# Altium PCB ESP_Adapter_Board_GPIO_PIN.PcbDoc
Units mm, origin at the board's own origin, x right, y up, seen from the top; angles counter-clockwise.
Board outline 33 x 36 mm, 2 copper layers (Top Layer, Bottom Layer); 7 components, 35 nets, 87 pads, 49 vias.
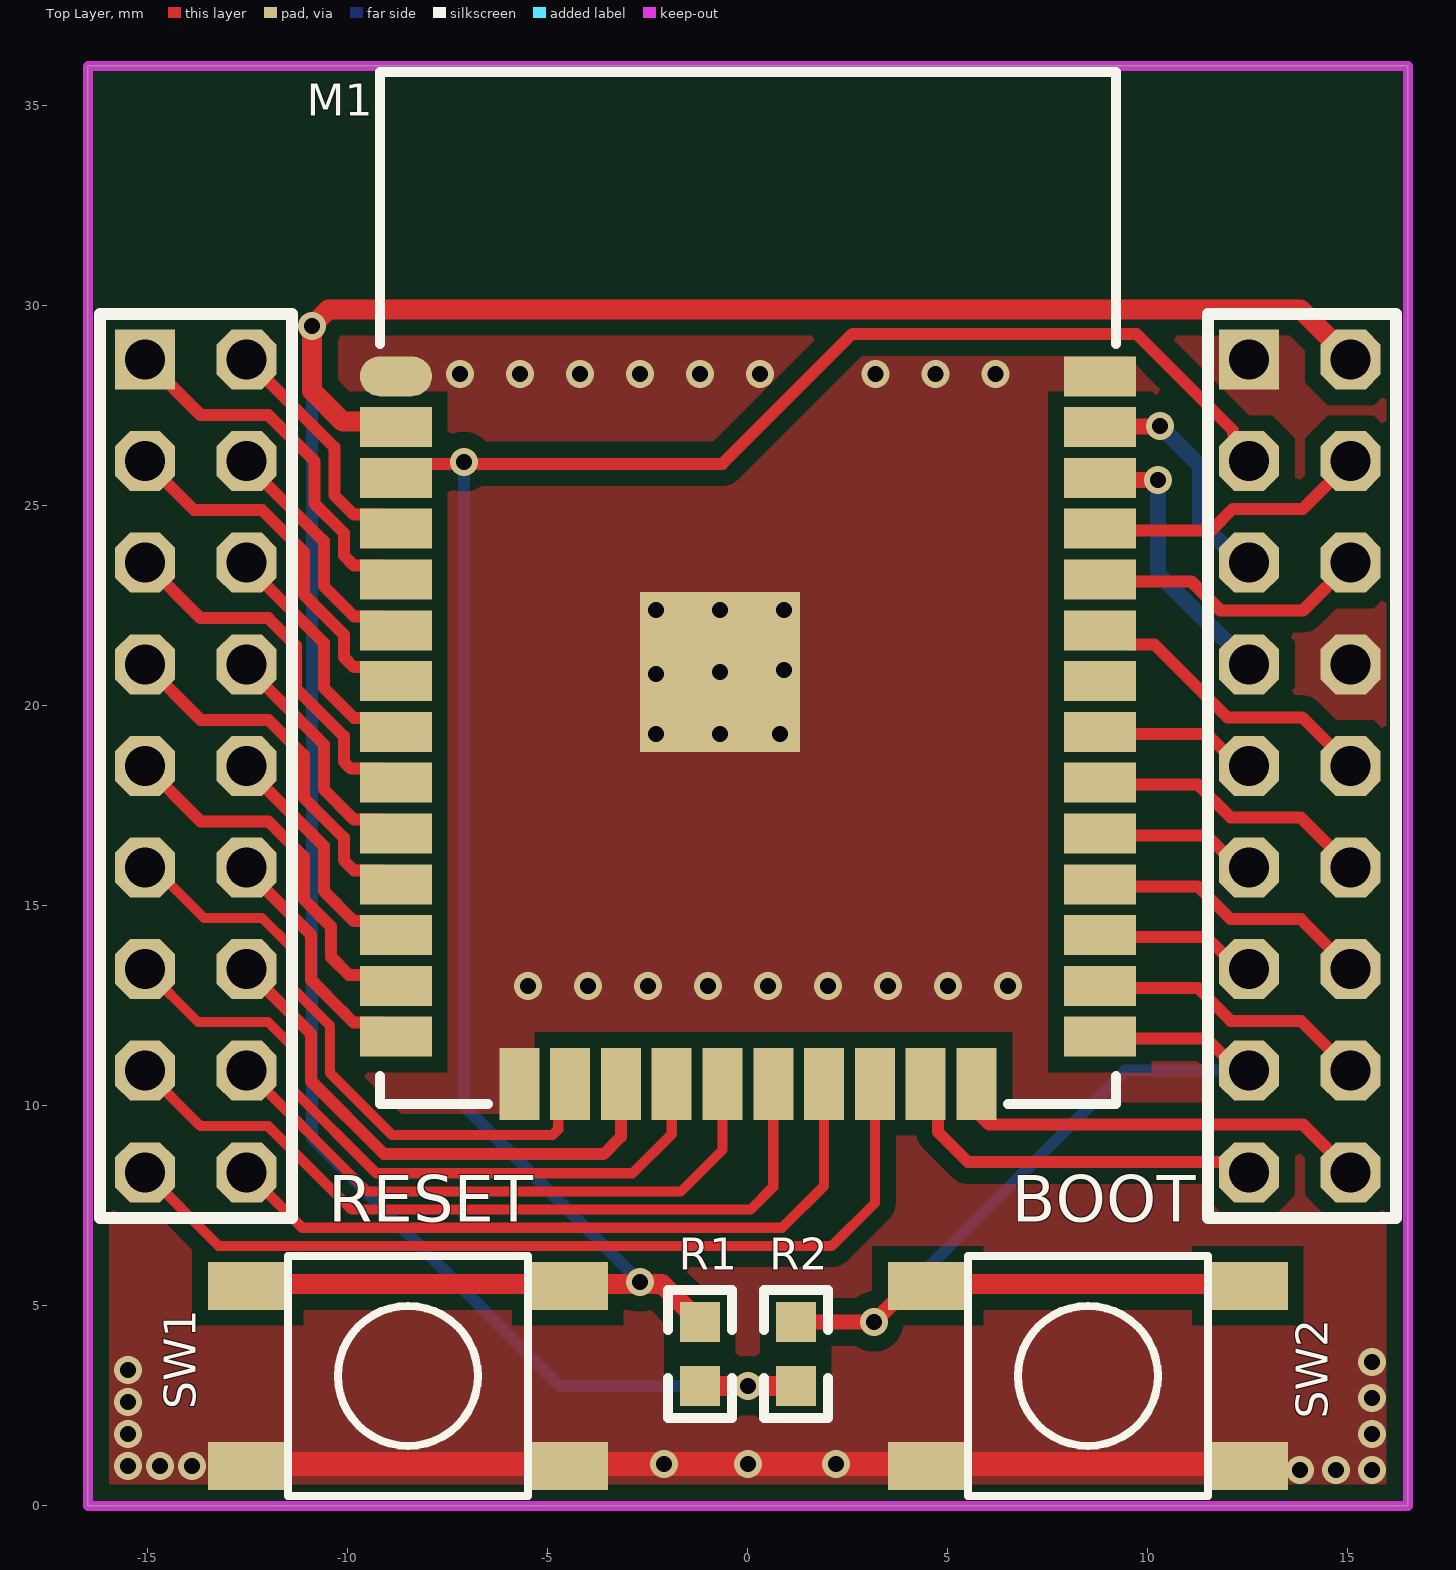
[diagram p0: Top Layer view]
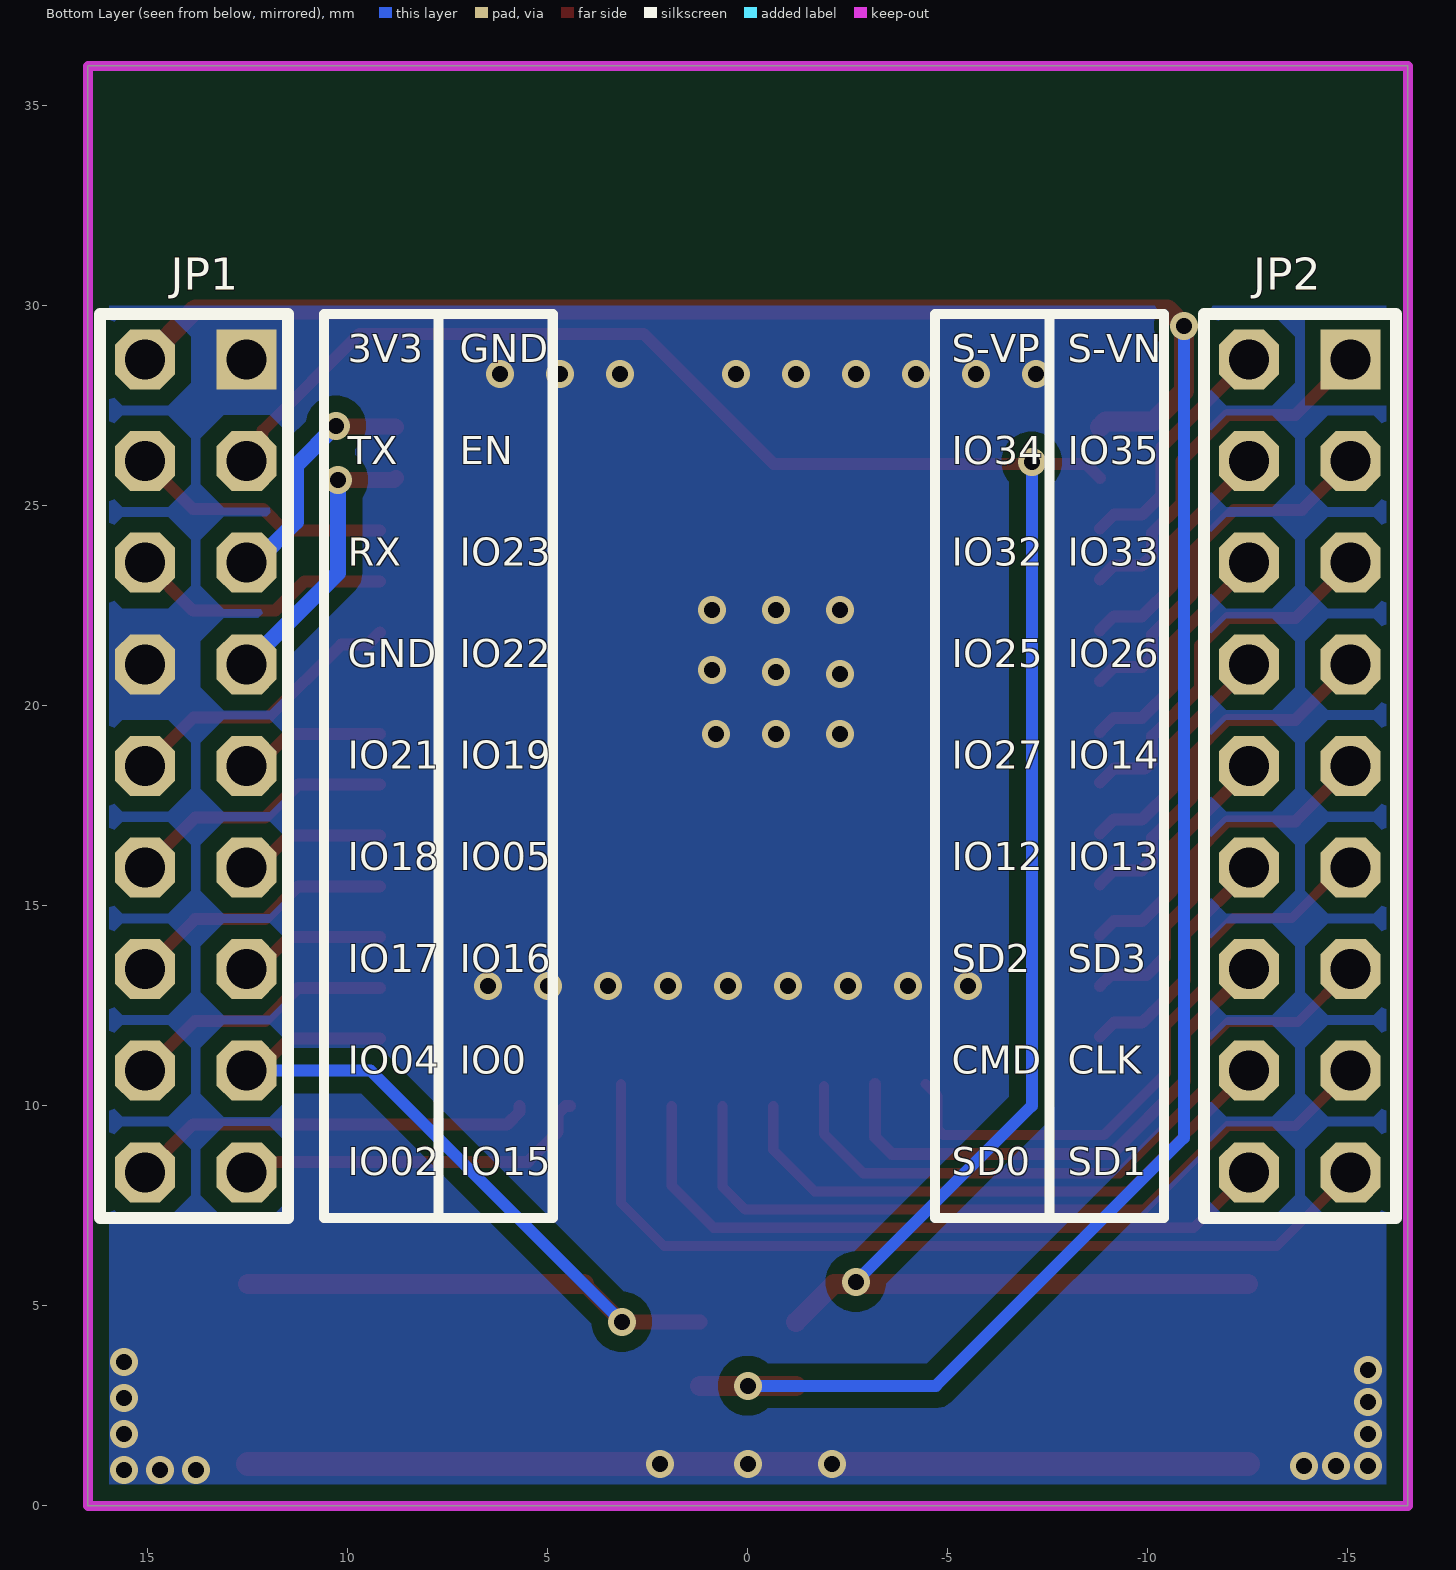
[diagram p1: Bottom Layer view, seen from below]
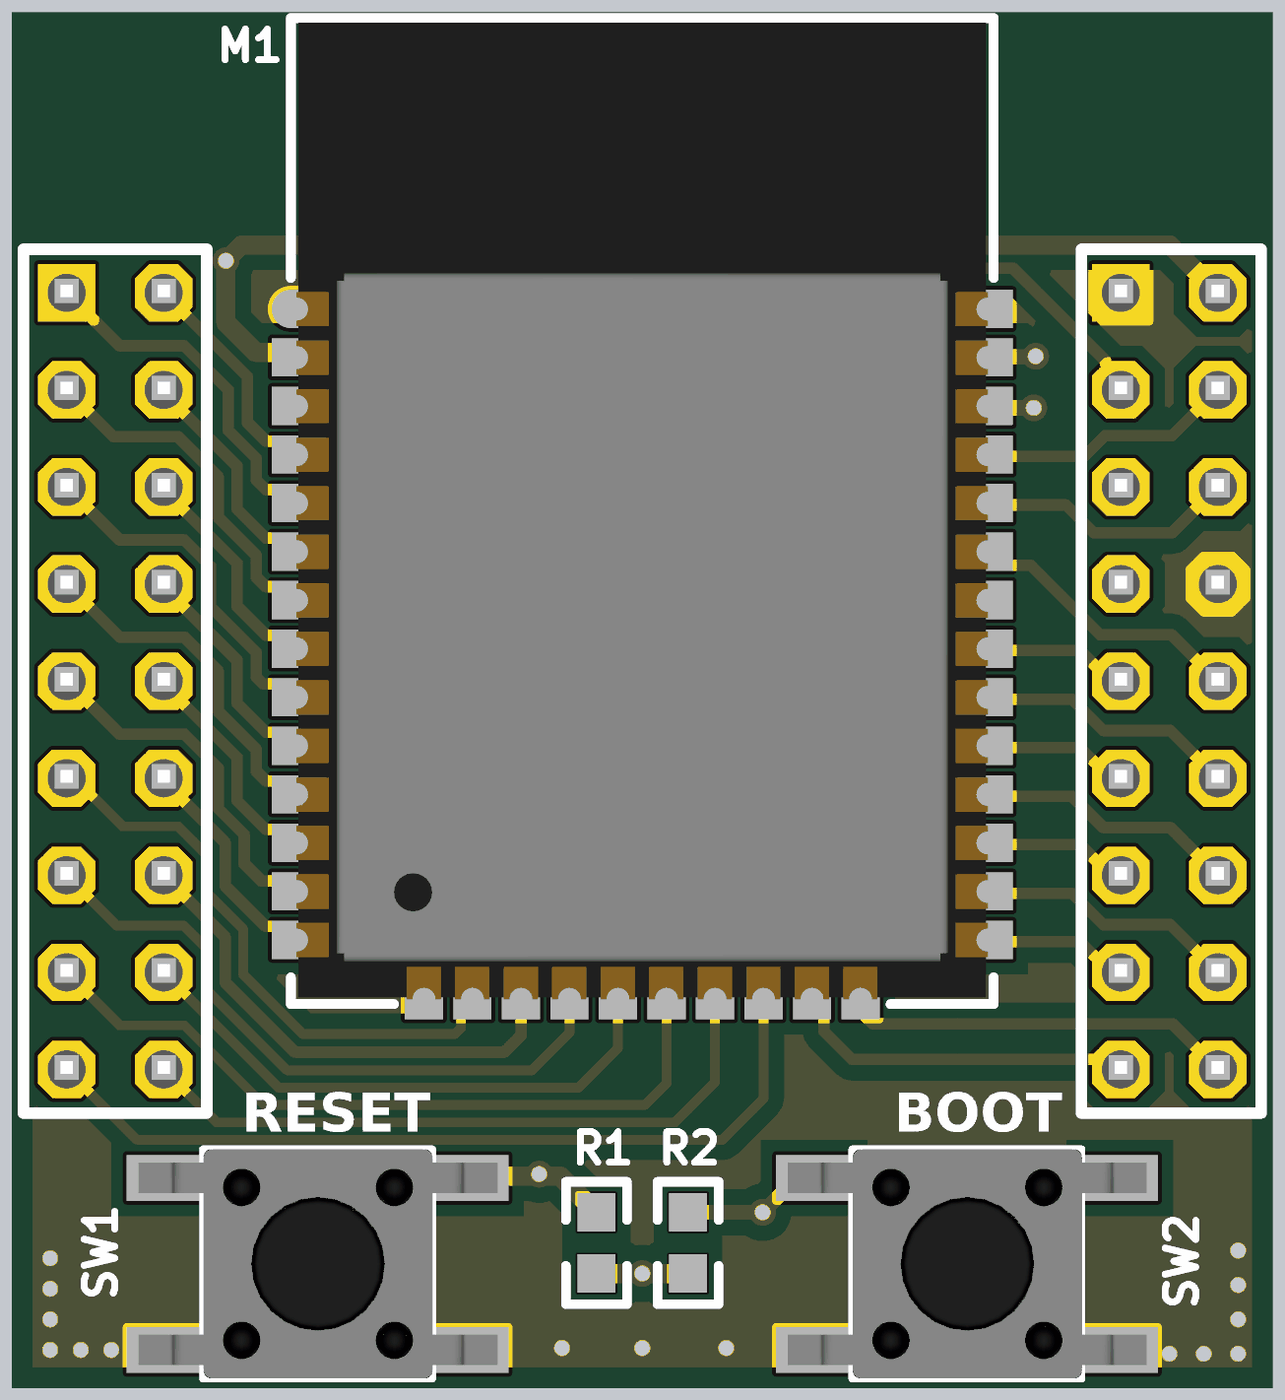
[diagram p2: 3D render of the assembled board from above, using the file's embedded part models]

## Layer stack, top to bottom
Top Solder: solder mask 0.0102, Solder Resist, Dk 3.5
Top Layer: signal copper 0.0356
Dielectric 1: dielectric 0.32, FR-4, Dk 4.8
Bottom Layer: signal copper 0.0356
Bottom Solder: solder mask 0.0102, Solder Resist, Dk 3.5

## Board outline
-16.5,0 16.5,0 16.5,36 -16.5,36

## Design rules (kind name [scope] priority, off if disabled: settings)
Clearance [All] p1: gap=0.254 ignorepadtopadclearanceinfootprint=FALSE except(0: Arc-Hole Track-Hole SMDPad-Hole THPad-Hole Via-Hole Fill-Hole Poly-Hole Region-Hole Text-Hole; 0.2: Arc-Track Track-Track; 0.4: Arc-Poly Track-Poly SMDPad-Poly THPad-Poly Via-Poly Fill-Poly Poly-Poly)
PlaneConnect [All] p1: planeconnectstyle=Direct reliefexpansion=0.508 reliefentries=4 reliefconductorwidth=0.254 reliefairgap=0.254
PolygonConnect [All] p1: connectstyle=Direct reliefconductorwidth=0.254 reliefentries=4 polygonreliefangle="90 Angle" airgapwidth=0.254
RoomDefinition ESP_Adapter_Board_GPIO_PIN [InComponentClass('ESP_Adapter_Board_GPIO_PIN')] p1: confinementstyle=ConfineIn formatcopy=TRUE lockcomponents=FALSE outline -17.4,-1.2 17.7,-1.2 17.7,36.9 -17.4,36.9
RoutingVias [All] p1: holewidth=0.4 width=0.6 viastyle="Through Hole" minholewidth=0.3 minwidth=0.4 maxholewidth=0.6 maxwidth=1
SolderMaskExpansion [All] p1: expansion=0.102 istentingtop=FALSE
Width [All] p1: maxlimit=0.7 minlimit=0.2 preferedwidth=0.4
29 further rules are at their usual default settings.

## Components (designator, comment, footprint, x,y, rotation, side; value= is the part's Value field where it differs from the comment)
JP1 "HEADER 9X2" "H 9X2" 13.8,18.5 r270 bottom
JP2 "HEADER 9X2" "H 9X2" -13.8,18.5 r270 bottom
M1 "ESP-WROOM-32" "WIFI MODUL ESP-WROOM-32" 0,22.95 r0 top
R1 "01C" "CRES1608-0603 3D" -1.2,3.8 r90 top
R2 "01C" "CRES1608-0603 3D" 1.2,3.8 r90 top
SW1 "REG" "SMD TAC SW 6x6x4.3mm" -8.5,3.25 r180 top
SW2 "REG" "SMD TAC SW 6x6x4.3mm" 8.5,3.25 r180 top

## Footprints (in the part's own frame and the unit in brackets; to place one, negate y for a bottom-side part, rotate by r counter-clockwise, add the part's x,y. Pads: shape width x height; smd on the part's side, far side on the other; paste and mask are expansions set on the pad)
"CRES1608-0603 3D" [mm]
  rect 1x1 smd mask+0.05: 1(-0.8,0) 2(0.8,0)
  silkscreen extent -1.6,-0.8 1.6,0.8, body extent -0.8,-0.4 0.8,0.4, height 0.55
"H 9X2" [mm]
  rect 1.5x1.5 hole 1: 1(-10.16,1.27)
  oct 1.5x1.5 hole 1: 2(-10.16,-1.27) 3(-7.62,1.27) 4(-7.62,-1.27) 5(-5.08,1.27) 6(-5.08,-1.27) 7(-2.54,1.27) 8(-2.54,-1.27) 9(0,1.27) 10(0,-1.27) 11(2.54,1.27) 12(2.54,-1.27) 13(5.08,1.27) 14(5.08,-1.27) 15(7.62,1.27) 16(7.62,-1.27) 17(10.16,1.27) 18(10.16,-1.27)
  silkscreen extent -11.3,-2.4 11.3,2.3, body extent -11.48,-2.41 11.38,2.41, height 8.14
"SMD TAC SW 6x6x4.3mm" [mm]
  rect 2x1.2 smd: 1(-4,2.25) 2(4,2.25) 3(-4,-2.25) 4(4,-2.25)
  silkscreen extent -3,-3 3,3, body extent -4.71,-3 4.69,3, height 4.3
"WIFI MODUL ESP-WROOM-32" [mm]
  rect 4x4 smd: 0(-0.7,-2.1)
  oval 1.8x1 smd: 1(-8.8,5.29)
  rect 1.8x1 smd: 2(-8.8,4.02) 3(-8.8,2.75) 4(-8.8,1.48) 5(-8.8,0.21) 6(-8.8,-1.06) 7(-8.8,-2.33) 8(-8.8,-3.6) 9(-8.8,-4.87) 10(-8.8,-6.14) 11(-8.8,-7.41) 12(-8.8,-8.68) 13(-8.8,-9.95) 14(-8.8,-11.22) 25(8.8,-11.22) 26(8.8,-9.95) 27(8.8,-8.68) 28(8.8,-7.41) 29(8.8,-6.14) 30(8.8,-4.87) 31(8.8,-3.6) 32(8.8,-2.33) 33(8.8,-1.06) 34(8.8,0.21) 35(8.8,1.48) 36(8.8,2.75) 37(8.8,4.02) 38(8.8,5.29)
  rect 1x1.8 smd: 15(-5.715,-12.4) 16(-4.445,-12.4) 17(-3.175,-12.4) 18(-1.905,-12.4) 19(-0.635,-12.4) 20(0.635,-12.4) 21(1.905,-12.4) 22(3.175,-12.4) 23(4.445,-12.4) 24(5.715,-12.4)
  silkscreen extent -9.2,-12.9 9.2,12.9, body extent -9.05,-12.78 9.05,12.77, height 3.08

## Part data
M1: library part "WIFI MODUL ESP-WROOM-32"
R1 R2: library part "RES_SMD0603 0.100W", "RES_SMD0603 0.100W"
SW1 SW2: library part "SW PB - TAC2", "4 PIN"

## Via types
v1: diameter 0.7, hole 0.4, Top Layer to Bottom Layer, tented both sides, 49 vias

## Nets (pads, with @x,y where several pads share a name; then routed paths per layer and width w, separated by ;. In a path a pad name is that pad's centre, name@x,y a point inside that pad or via, vN(x,y) a via of type N, cw(c..) or ccw(c..) an arc to the next point about the centre after c; other vN are vias at no path point)
3V3: JP1.2 M1.2 R1.1 R2.1 | length 66.9
  Top Layer w0.5: M1.2 -8.935,27.105 -10.126,27.105 -10.9,27.879 v1(-10.9,29.5) -10.486,29.914 13.816,29.914 JP1.2 ; R1.1 v1(0,3) R2.1
  Bottom Layer w0.3: v1(-10.9,29.5) -10.9,9.2 -4.7,3 v1(0,3)
CLK: JP2.15 M1.20 | length 19.4
  Top Layer w0.254: JP2.15 -13.684,9.494 -11.988,9.494 -9.901,7.407 0.066,7.407 0.635,7.976 M1.20@0.635,10
CMD: JP2.16 M1.19 | length 14.7
  Top Layer w0.254: JP2.16 -9.511,7.861 -1.673,7.861 -0.635,8.899 M1.19@-0.635,10
EN: JP1.3 M1.3 R1.2 SW1.3 SW1.4 | length 58.4
  Top Layer w0.3: M1.3 -8.45,26.05 -0.638,26.05 2.612,29.3 9.711,29.3 12.13,26.881 12.13,26.807 12.53,26.407 JP1.3
  Top Layer w0.5: SW1.4@-12.5,5.55 -2.15,5.55 R1.2
  Bottom Layer w0.3: v1(-7.1,26.1) -7.1,10 v1(-2.7,5.6)
GND: JP1.1 JP1.8 M1.0 M1.1 M1.15 M1.38 SW1.1 SW1.2 SW2.1 SW2.2 | length 25
  Top Layer w0.6: SW1.2@-12.5,1.05 -4.5,1.05 4.5,1.05 SW2.1@12.5,1.05
  other v1: 13.8,0.9 14.7,0.9 15.6,0.9 -15.5,1 -14.7,1 -13.9,1 -2.1,1.05 0,1.05 2.2,1.05 -15.5,1.8 15.6,1.8 -15.5,2.6 15.6,2.7 -15.5,3.4 15.6,3.6 -5.5,13 -4,13 -2.5,13 -1,13 0.5,13 2,13 3.5,13 5,13 6.5,13 -2.3,19.3 -0.7,19.3 0.8,19.3 -2.3,20.8 -0.7,20.85 0.9,20.9 -2.3,22.4 -0.7,22.4 0.9,22.4 -7.2,28.3 -5.7,28.304 -4.2,28.3 -2.7,28.3 -1.2,28.3 0.3,28.3 3.195,28.3 4.695,28.3 6.195,28.3
IO0: JP1.15 M1.25 R2.2 SW2.3 SW2.4 | length 27.3
  Top Layer w0.3: M1.25@9.2,11.68 11.467,11.68 12.267,10.88 JP1.15
  Top Layer w0.381: R2.2 v1(3.15,4.6) SW2.4@4.1,5.55
  Top Layer w0.5: SW2.4@4.1,5.55 SW2.3@12.5,5.55
  Bottom Layer w0.3: v1(3.15,4.6) 9.43,10.88 JP1.15
IO02: JP1.18 M1.24 | length 10.1
  Top Layer w0.3: M1.24@5.715,10 5.715,9.844 6.025,9.535 13.875,9.535 JP1.18
IO04: JP1.16 M1.26 | length 6.7
  Top Layer w0.3: M1.26@9.2,12.95 11.246,12.95 12.067,12.129 13.821,12.129 JP1.16
IO05: JP1.11 M1.29 | length 3.7
  Top Layer w0.3: M1.29@9.2,16.76 11.467,16.76 12.267,15.96 JP1.11
IO12: JP2.12 M1.14 | length 6.2
  Top Layer w0.3: JP2.12 -12.53,15.884 -10.922,14.276 -10.922,13.151 -10.104,12.333 -9.851,12.08 -9.15,12.08 M1.14
IO13: JP2.11 M1.16 | length 15.7
  Top Layer w0.254: JP2.11 -14.86,15.96 -13.6,14.7 -12.146,14.7 -11.399,13.953 -11.399,12.953 -10.445,11.999 -10.445,10.82 -8.894,9.269 -4.892,9.269 -4.744,9.418 -4.744,10.251 M1.16
IO14: JP2.9 M1.13 | length 9.6
  Top Layer w0.3: JP2.9 -13.684,17.114 -11.988,17.114 -11.104,16.23 -11.104,15.166 -10.422,14.484 -10.422,13.722 -9.968,13.268 -9.068,13.268 M1.13
IO15: JP1.17 M1.23 | length 9
  Top Layer w0.3: M1.23@4.445,10 4.554,10 4.755,9.8 4.755,9.345 5.5,8.6 12.27,8.6 JP1.17
IO16: JP1.13 M1.27 | length 3.7
  Top Layer w0.3: M1.27@9.2,14.22 11.467,14.22 12.267,13.42 JP1.13
IO17: JP1.14 M1.28 | length 6.7
  Top Layer w0.3: M1.28@9.2,15.49 11.246,15.49 12.067,14.669 13.821,14.669 JP1.14
IO18: JP1.12 M1.30 | length 6.7
  Top Layer w0.3: M1.30@9.2,18.03 11.246,18.03 12.067,17.209 13.821,17.209 JP1.12
IO19: JP1.9 M1.31 | length 3.7
  Top Layer w0.3: M1.31@9.2,19.3 11.467,19.3 12.267,18.5 JP1.9
IO21: JP1.10 M1.33 | length 7.3
  Top Layer w0.3: M1.33@9.2,21.84 9.51,21.53 10.17,21.53 11.988,19.712 13.858,19.712 JP1.10
IO22: JP1.7 M1.36 | length 7
  Top Layer w0.4: M1.36 8.85,25.65 v1(10.25,25.65)
  Bottom Layer w0.4: v1(10.25,25.65) 10.25,23.32 JP1.7
IO23: JP1.5 M1.37 | length 6
  Top Layer w0.4: M1.37 8.815,26.985 10.285,26.985 v1(10.3,27)
  Bottom Layer w0.4: v1(10.3,27) 11.298,26.002 11.298,24.602 12.32,23.58 JP1.5
IO25: JP2.8 M1.10 | length 6.2
  Top Layer w0.3: JP2.8 -12.53,20.964 -10.604,19.038 -10.604,17.913 -9.851,17.16 -9.15,17.16 M1.10
IO26: JP2.7 M1.11 | length 9.5
  Top Layer w0.3: JP2.7 -13.684,19.654 -11.988,19.654 -11.104,18.77 -11.104,17.706 -10.104,16.706 -10.104,16.143 -9.851,15.89 -9.15,15.89 M1.11
IO27: JP2.10 M1.12 | length 6.2
  Top Layer w0.3: JP2.10 -12.53,18.424 -10.604,16.498 -10.604,15.373 -9.851,14.62 -9.15,14.62 M1.12
IO32: JP2.6 M1.8 | length 6.2
  Top Layer w0.3: JP2.6 -12.53,23.504 -10.604,21.578 -10.604,20.453 -9.851,19.7 -9.15,19.7 M1.8
IO33: JP2.5 M1.9 | length 9.5
  Top Layer w0.3: JP2.5 -13.684,22.194 -11.988,22.194 -11.3,21.506 -11.3,20.442 -10.104,19.246 -10.104,18.606 -9.928,18.43 -9.15,18.43 M1.9
IO34: JP2.4 M1.6 | length 6.2
  Top Layer w0.3: JP2.4 -12.53,26.044 -10.604,24.118 -10.604,22.993 -9.851,22.24 -9.15,22.24 M1.6
IO35: JP2.3 M1.7 | length 9.5
  Top Layer w0.3: JP2.3 -13.85,24.9 -12.154,24.9 -11.104,23.85 -11.104,22.786 -10.104,21.786 -10.104,21.223 -9.851,20.97 -9.15,20.97 M1.7
RX: JP1.6 M1.34 | length 6.7
  Top Layer w0.3: M1.34@9.2,23.11 11.09,23.11 11.815,22.386 13.875,22.386 JP1.6
S-VN: JP2.1 M1.5 | length 9.5
  Top Layer w0.3: JP2.1 -13.684,27.274 -11.988,27.274 -10.839,26.125 -10.839,25.06 -10.104,24.326 -10.104,23.763 -9.851,23.51 -9.15,23.51 M1.5
S-VP: JP2.2 M1.4 | length 6.2
  Top Layer w0.3: JP2.2 -10.339,26.469 -10.339,25.267 -9.851,24.78 -9.15,24.78 M1.4
SD0: JP2.18 M1.21 | length 17.4
  Top Layer w0.254: JP2.18 -11.143,6.953 0.853,6.953 1.905,8.005 M1.21@1.905,10
SD1: JP2.17 M1.22 | length 22.4
  Top Layer w0.254: JP2.17 -13.229,6.499 2.099,6.499 3.175,7.575 M1.22
SD2: JP2.14 M1.17 | length 13.5
  Top Layer w0.3: JP2.14 -12.53,13.41 -10.922,11.802 -10.922,10.622 -9.092,8.792 -3.608,8.792 -3.175,9.225 M1.17
SD3: JP2.13 M1.18 | length 17.5
  Top Layer w0.254: JP2.13 -13.75,12.1 -12,12.1 -11.399,11.499 -11.399,10.424 -9.29,8.315 -2.885,8.315 -1.905,9.295 M1.18@-1.905,10.5
TX: JP1.4 M1.35 | length 6.6
  Top Layer w0.3: M1.35@9.2,24.38 11.576,24.38 12.122,24.926 13.875,24.926 JP1.4
pads on no net: M1.32

## Polygon pours and split planes (outlines as drawn)
GND on Bottom Layer "GND_L02_P000" (solid, remove dead copper, pour order 0): -16.5,0 -16.5,30 16.5,30 16.5,0 16.4,0
GND on Top Layer "GND_L01_P001" (solid, remove dead copper, pour order 1): -16.5,0 -16.5,30 16.5,30 16.5,0 16.4,0

## Keep-outs
Keep-Out Layer:
  the board outline again, w0.254

## Silkscreen, mask and mechanical layers (free items; w line width, h text height)
Top Overlay:
  text "RESET" at -10.49,6.718 h2
  text "BOOT" at 6.591,6.718 h2
Bottom Overlay:
  lines w0.254: -7.539,7.2 -7.539,29.8 ; 7.739,7.2 7.739,29.8 ; -10.4,7.2 -4.678,7.2 -4.678,29.8 -10.4,29.8 -10.4,7.2 ; 4.878,7.2 10.6,7.2 10.6,29.8 4.878,29.8 4.878,7.2
  text "S-VN" at -8,28.349 h1.2
  text "S-VP" at -5.1,28.349 h1.2
  text "GND" at 7.2,28.35 h1.2
  text "3V3" at 10,28.349 h1.2
  text "IO35" at -8,25.809 h1.2
  text "IO34" at -5.1,25.809 h1.2
  text "EN" at 7.2,25.81 h1.2
  text "TX" at 10,25.809 h1.2
  text "IO33" at -8,23.269 h1.2
  text "IO32" at -5.1,23.269 h1.2
  text "IO23" at 7.2,23.269 h1.2
  text "RX" at 10,23.269 h1.2
  text "IO26" at -8,20.729 h1.2
  text "IO25" at -5.1,20.729 h1.2
  text "IO22" at 7.2,20.729 h1.2
  text "GND" at 10,20.73 h1.2
  text "IO14" at -8,18.189 h1.2
  text "IO27" at -5.1,18.189 h1.2
  text "IO19" at 7.2,18.189 h1.2
  text "IO21" at 10,18.189 h1.2
  text "IO13" at -8,15.649 h1.2
  text "IO12" at -5.1,15.649 h1.2
  text "IO05" at 7.2,15.649 h1.2
  text "IO18" at 10,15.649 h1.2
  text "SD3" at -8,13.109 h1.2
  text "SD2" at -5.1,13.109 h1.2
  text "IO16" at 7.2,13.109 h1.2
  text "IO17" at 10,13.109 h1.2
  text "CLK" at -8,10.57 h1.2
  text "CMD" at -5.1,10.57 h1.2
  text "IO0" at 7.2,10.569 h1.2
  text "IO04" at 10,10.569 h1.2
  text "SD1" at -8,8.029 h1.2
  text "SD0" at -5.1,8.029 h1.2
  text "IO15" at 7.2,8.029 h1.2
  text "IO02" at 10,8.029 h1.2